# EAGLE board msp432 feather board (EAGLE 9.5.2)
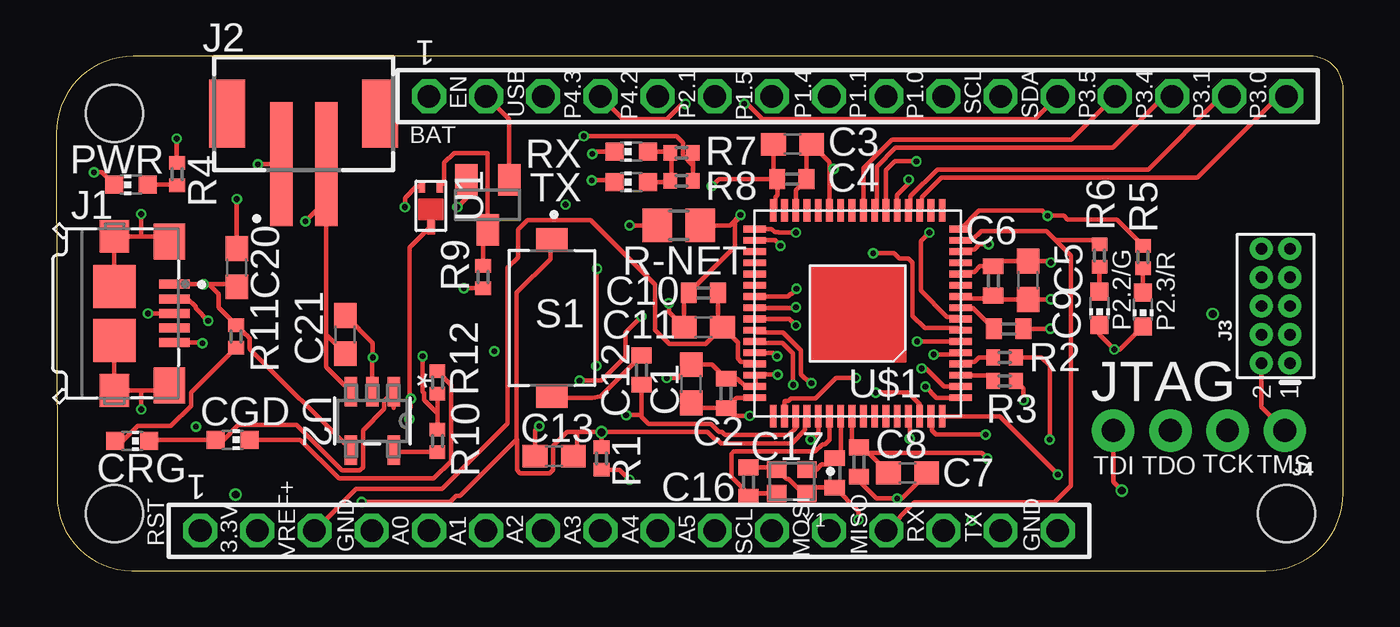
[diagram p0: board, top side]
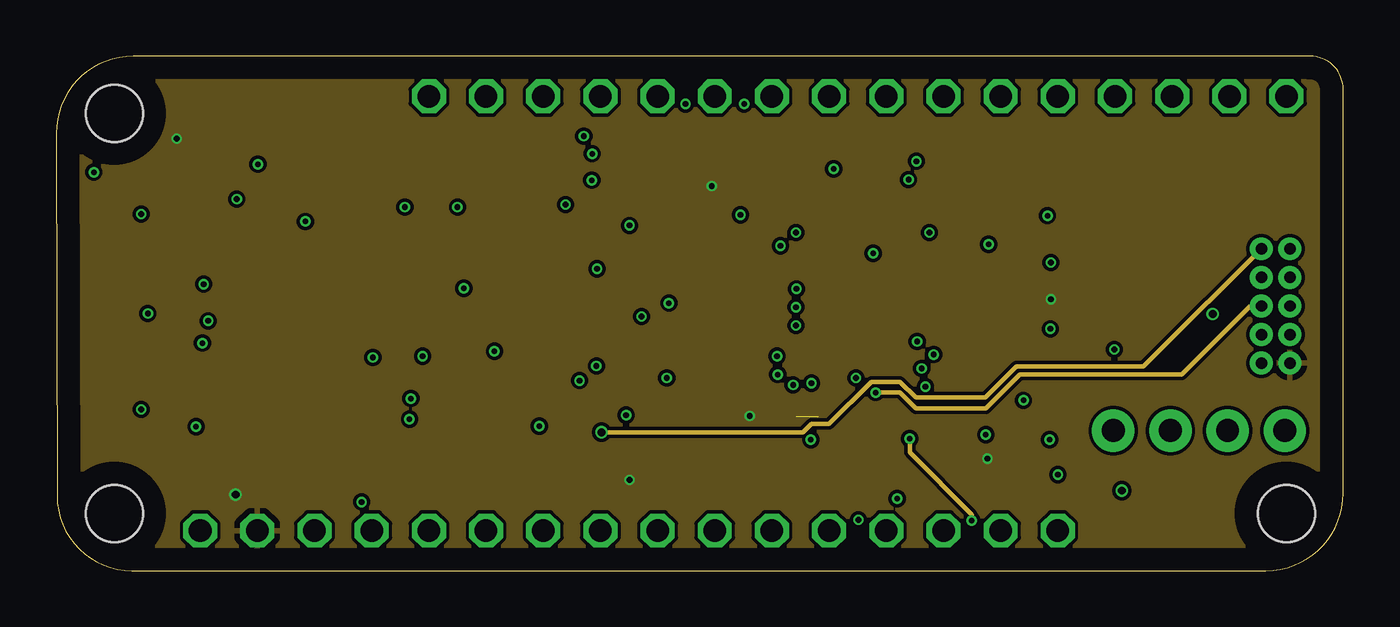
[diagram p1: board, inner layer Route2]
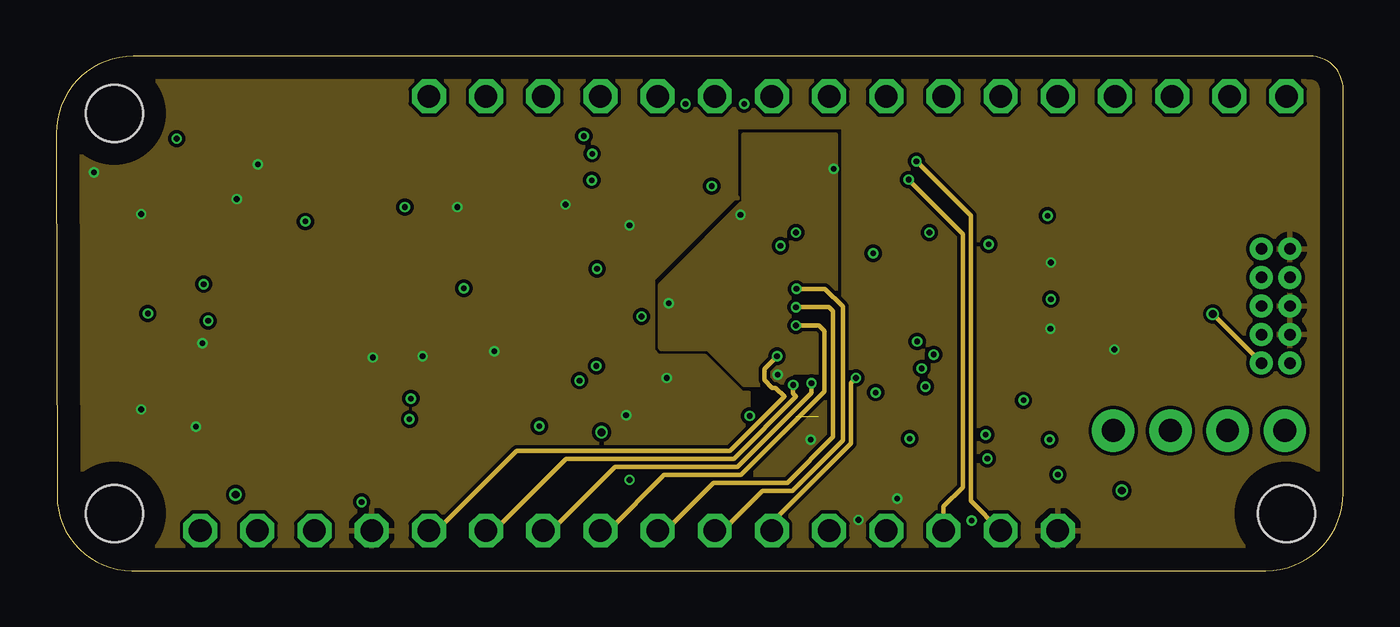
[diagram p2: board, inner layer Route15]
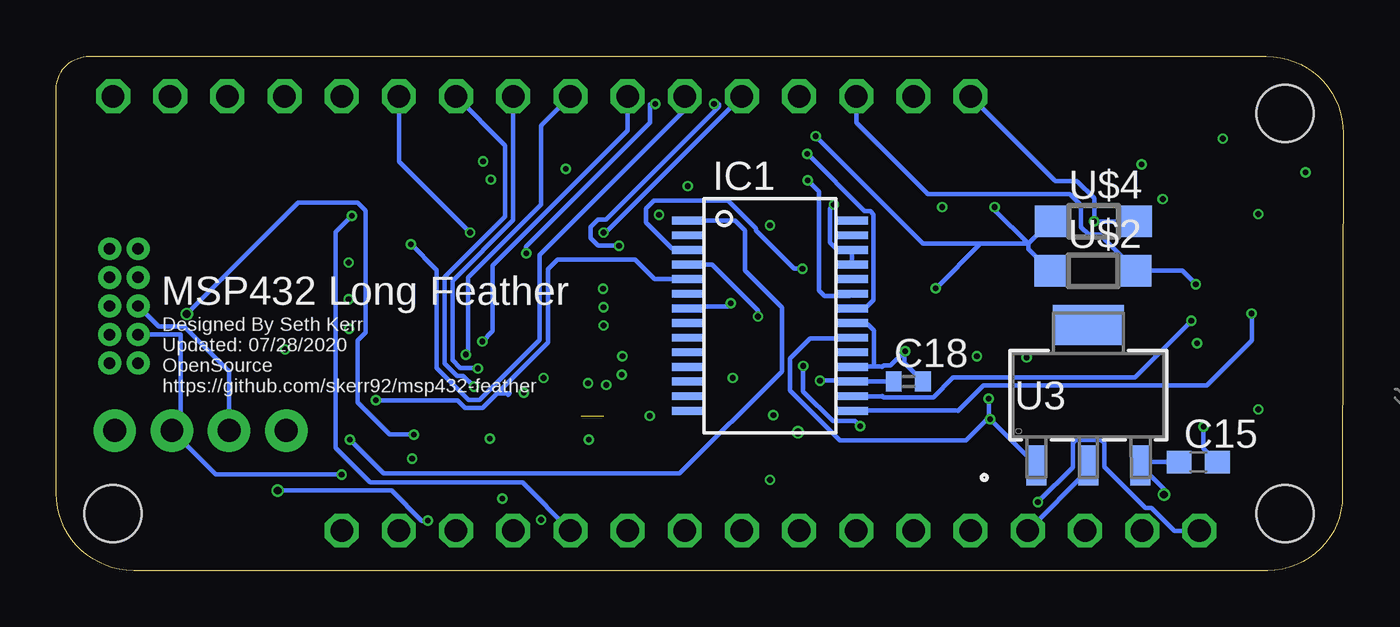
[diagram p3: board, bottom side, seen from below]

Size 57.17 x 22.86 mm. Coordinates in mm from the lower left corner, seen from the top.
Outline: 0,19.44 0.04,3.32 arc90 3.36,0 53.74,0 arc90 57.17,3.43 57.17,21.39 arc90 55.71,22.86 3.42,22.86 arc90 0,19.44
Copper layers (1+2*15+16): Top 0.035mm / dielectric 1.5mm / Route2 0.035mm / dielectric 0.15mm / Route15 0.035mm / dielectric 0.2mm / Bottom 0.035mm
Design rules "default *": minimum track width 6mil, minimum drill 10mil, track to track 6mil, track to pad 6mil, pad to pad 6mil, via to via 6mil, smd to smd 6mil, copper to edge 40mil, drill to drill 6mil, minimum pad ring 10mil, minimum via ring 4mil, stop-mask expansion 4mil, vias tented up to drill 35mil, thermal gap 10mil
Net classes: 0 default: width 0.203 mm, clearance 0.127 mm; 1 PWR: width 0.203 mm, clearance 0.127 mm; 2 analog: width 0.152 mm, clearance 0.152 mm; 3 digital: width 0.203 mm, clearance 0.152 mm
Holes 2.54 mm at 2.58,20.32 2.58,2.54 54.65,2.54

## Footprints (pad centres in the part's own frame; a part is rotated, then mirrored left to right if it is on the bottom)
C0603 = smd 1.1 x 1: 1 -0.85,0; 2 0.85,0
C0402 = smd 0.7 x 0.9: 1 -0.65,0; 2 0.65,0
CHIP-LED0603 = smd 0.8 x 0.8: A 0,-0.75; C 0,0.75
SSOP28-LD = smd 0.348 x 1.397: 1 -4.225,-3.656; 2 -3.575,-3.656; 3 -2.925,-3.656; 4 -2.275,-3.656; 5 -1.625,-3.656; 6 -0.975,-3.656; 7 -0.325,-3.656; 8 0.325,-3.656; 9 0.975,-3.656; 10 1.625,-3.656; 11 2.275,-3.656; 12 2.925,-3.656; 13 3.575,-3.656; 14 4.225,-3.656; 15 4.225,3.656; 16 3.575,3.656; 17 2.925,3.656; 18 2.275,3.656; 19 1.625,3.656; 20 0.975,3.656; 21 0.325,3.656; 22 -0.325,3.656; 23 -0.975,3.656; 24 -1.625,3.656; 25 -2.275,3.656; 26 -2.925,3.656; 27 -3.575,3.656; 28 -4.225,3.656
TE_1981568-1 = smd 0.4 x 1.35: 1 -1.3,2.675; 2 -0.65,2.675; 3 0,2.675; 4 0.65,2.675; 5 1.3,2.675 | smd 1.6 x 1.4: 6 -3.2,2.45; 7 3.2,2.45 | smd 1.45 x 1.3: 8 3.425,0; 9 -3.425,0 | smd 1.9 x 1.9: 10 -1.2,0; 11 1.2,0
JST_B2B-PH-SM4-TB(LF)(SN) = smd 1 x 5.5: 1 -1,0; 2 1,0 | smd 1.6 x 3: 3 -3.4,2.25; 4 3.4,2.25
2X5-PTH-1.27MM = drill 0.508 pad 1: 1 -2.54,-0.635; 2 -2.54,0.635; 3 -1.27,-0.635; 4 -1.27,0.635; 5 0,-0.635; 6 0,0.635; 7 1.27,-0.635; 8 1.27,0.635; 9 2.54,-0.635; 10 2.54,0.635
1X04_NO_SILK = drill 1.016 pad 1.88: 1 0,0; 2 2.54,0; 3 5.08,0; 4 7.62,0
R0402 = smd 0.6 x 0.7: 1 -0.5,0; 2 0.5,0
R0805 = smd 1.3 x 1.5: 1 -0.95,0; 2 0.95,0
SW_KSR223GLFG = smd 1 x 1.4: 1 -3.5,0; 2 3.5,0
X2-DFN2015-3 = smd 0.5 x 0.31: 1 1.3,0.65; 2 -0.45,1.05; 3 -0.45,0.25
SOT-23-5_MC = smd 1.321 x 0.559: 1 -1.295,0.95; 2 -1.295,0; 3 -1.295,-0.95; 4 1.295,-0.95; 5 1.295,0.95
DCY4 = smd 0.889 x 1.765: 1 -2.311,-3.118; 2 0,-3.118; 3 2.311,-3.118 | smd 3.15 x 1.765: 4 0,3.118
MSP432_QFN_64 = smd 1 x 0.3: 1 -4.575,3.75; 2 -4.575,3.25; 3 -4.575,2.75; 4 -4.575,2.25; 5 -4.575,1.75; 6 -4.575,1.25; 7 -4.575,0.75; 8 -4.575,0.25; 9 -4.575,-0.25; 10 -4.575,-0.75; 11 -4.575,-1.25; 12 -4.575,-1.75; 13 -4.575,-2.25; 14 -4.575,-2.75; 15 -4.575,-3.25; 16 -4.575,-3.75; 33 4.575,-3.75; 34 4.575,-3.25; 35 4.575,-2.75; 36 4.575,-2.25; 37 4.575,-1.75; 38 4.575,-1.25; 39 4.575,-0.75; 40 4.575,-0.25; 41 4.575,0.25; 42 4.575,0.75; 43 4.575,1.25; 44 4.575,1.75; 45 4.575,2.25; 46 4.575,2.75; 47 4.575,3.25; 48 4.575,3.75 | smd 0.3 x 1: 17 -3.75,-4.575; 18 -3.25,-4.575; 19 -2.75,-4.575; 20 -2.25,-4.575; 21 -1.75,-4.575; 22 -1.25,-4.575; 23 -0.75,-4.575; 24 -0.25,-4.575; 25 0.25,-4.575; 26 0.75,-4.575; 27 1.25,-4.575; 28 1.75,-4.575; 29 2.25,-4.575; 30 2.75,-4.575; 31 3.25,-4.575; 32 3.75,-4.575; 49 3.75,4.575; 50 3.25,4.575; 51 2.75,4.575; 52 2.25,4.575; 53 1.75,4.575; 54 1.25,4.575; 55 0.75,4.575; 56 0.25,4.575; 57 -0.25,4.575; 58 -0.75,4.575; 59 -1.25,4.575; 60 -1.75,4.575; 61 -2.25,4.575; 62 -2.75,4.575; 63 -3.25,4.575; 64 -3.75,4.575
SOD3716X117(SOD-123) = smd 1.4 x 1.4: 1 -1.9,0.051; 2 1.9,0.051
BSS138 = smd 1 x 1.4: D 0,1.1; G -0.95,-1.1; S 0.95,-1.1
TSW-116-XX-G-S = drill 1 pad 1.5 octagon: 1 19.05,0; 2 16.51,0; 3 13.97,0; 4 11.43,0; 5 8.89,0; 6 6.35,0; 7 3.81,0; 8 1.27,0; 9 -1.27,0; 10 -3.81,0; 11 -6.35,0; 12 -8.89,0; 13 -11.43,0; 14 -13.97,0; 15 -16.51,0; 16 -19.05,0
XTAL_ECS-480-10-37-JTN-TR = smd 0.85 x 0.75: 1 -0.675,-0.525; 2 0.675,-0.525; 3 0.675,0.525; 4 -0.675,0.525

## Placement (x,y rotation side)
C1  4.7uF  [C0603]  28.21,8.31 90 top
C2  0.1uF  [C0402]  29.76,7.87 90 top
C3  4.7uF  [C0603]  32.71,18.95 0 top
C4  0.1uF  [C0402]  32.68,17.4 0 top
C5  4.7uF  [C0603]  43.17,12.9 90 top
C6  0.1uF  [C0402]  41.62,12.88 90 top
C7  4.7uF  [C0603]  37.81,4.34 0 top
C8  0.1uF  [C0402]  35.65,4.83 270 top
C9  0.1uF  [C0402]  42.31,10.74 0 top
C10  47nF  [C0402]  28.75,12.34 180 top
C11  4.7uF  [C0603]  28.75,10.82 180 top
C12  1.1nF  [C0402]  26,8.92 270 top
C13  0.1uF  [C0603]  22.12,5.08 0 top
C15  3.3uF  [C0603]  6.44,4.83 0 bottom
C16  22pF  [C0402]  30.75,3.94 90 top
C17  22pF  [C0402]  34.59,4.34 270 top
C18  0.1uF  [C0402]  19.32,8.41 0 bottom
C20  10uF  [C0603]  8.02,13.46 90 top
C21  10uF  [C0603]  12.84,10.49 90 top
CGD  [CHIP-LED0603]  7.84,5.82 270 top
CRG  [CHIP-LED0603]  3.37,5.77 270 top
IC1  FT232RL  [SSOP28-LD]  25.47,11.33 270 bottom
J1  1981568-1  [TE_1981568-1]  2.58,11.43 270 top
J2  B2B-PH-SM4-TB(LF)(SN)  [JST_B2B-PH-SM4-TB(LF)(SN)]  10.99,18.06 0 top
J3  CORTEX_JTAG_DEBUG_MINIMUM_PTH  [2X5-PTH-1.27MM]  54.17,11.76 90 top
J4  [1X04_NO_SILK]  54.58,6.22 180 top
P2.2/G  [CHIP-LED0603]  46.35,11.66 180 top
P2.3/R  [CHIP-LED0603]  48.28,11.61 180 top
PWR  [CHIP-LED0603]  3.32,17.14 90 top
R1  47K  [R0402]  24.22,4.98 270 top
R2  1K  [R0402]  42.13,9.47 0 top
R3  1K  [R0402]  42.13,8.43 0 top
R4  330  [R0402]  5.38,17.63 270 top
R5  220  [R0402]  48.28,13.94 90 top
R6  220  [R0402]  46.35,14 90 top
R7  330  [R0402]  27.78,18.57 0 top
R8  330  [R0402]  27.78,17.32 0 top
R9  100K  [R0402]  18.97,13.06 90 top
R10  2K2  [R0402]  16.93,5.77 90 top
R11  470  [R0402]  7.99,10.41 90 top
R12  470  [R0402]  16.93,8.36 90 top
R-NET  0  [R0805]  27.65,15.34 0 top
RX  [CHIP-LED0603]  25.54,18.62 90 top
S1  KSR223GLFG  [SW_KSR223GLFG]  22.01,11.23 270 top
TX  [CHIP-LED0603]  25.54,17.27 90 top
U1  DMG3415U-7X2-DFN2015-3  [X2-DFN2015-3]  15.99,16.61 270 top
U2  MCP73831T-2ACI/OT  [SOT-23-5_MC]  14.04,6.65 270 top
U3  [DCY4]  11.32,7.8 0 bottom
U$1  MSP432P401MIRGCR  [MSP432_QFN_64]  35.6,11.43 180 top
U$2  MBR0520LT1G  [SOD3716X117(SOD-123)]  11.12,13.28 0 bottom
U$3  BSS138  [BSS138]  19.17,16.26 180 top
U$4  MBR0520LT1G  [SOD3716X117(SOD-123)]  11.09,15.47 0 bottom
X1  TSW-116-07-G-S  [TSW-116-XX-G-S]  25.44,1.78 180 top
X2  TSW-116-07-G-S  [TSW-116-XX-G-S]  35.6,21.08 180 top
Y1  ECS-480-10-37-JTN-TR  [XTAL_ECS-480-10-37-JTN-TR]  32.68,3.96 180 top

## Library data of the parts
C1-C13 C15-C18 C20 C21 = rcl; SPICEPREFIX: C
CGD CRG P2.2/G P2.3/R PWR RX TX = led
IC1 = FT232RL; AVAILABILITY: Unavailable; DESCRIPTION: USB Bridge, USB to UART USB 2.0 UART Interface 28-SSOP; MF: FTDI, Future; MP: FT232RL; PACKAGE: SSOP-28 FTDI, Future; PRICE: None
J1 = 1981568-1; AVAILABILITY: Unavailable; DESCRIPTION: USB - micro B USB 2.0 Receptacle Connector 5 Position Surface Mount, Right Angle; MF: TE Connectivity; MP: 19815681; PACKAGE: None; PRICE: None; TE_PURCHASE_URL: https://www.te.com/usa-en/product-19815681.html?te_bu=Cor&te_type=disp&te_campaign=seda_glo_cor-seda-global-disp-prtnr-fy19-seda-model-bom-cta_sma-317_1&elqCampaignId=32493
J2 = B2B-PH-SM4-TB_LF__SN_; AVAILABILITY: Unavailable; DESCRIPTION: Connector Header Surface Mount 2 position 0.079 _2.00mm_; MF: JST Sales; MP: B2B-PH-SM4-TB_LF__SN_; PACKAGE: None; PRICE: None
J3 = SparkFun-Connectors
J4 = SparkFun-Connectors; PROD_ID: CONN-09696
R1-R12 R-NET = rcl; SPICEPREFIX: R
S1 = KSR223GLFG; AVAILABILITY: Unavailable; DESCRIPTION: Tactile Switch SPST-NO Top Actuated Surface Mount; MF: C&K; MP: KSR223GLFG; PACKAGE: None; PRICE: None
U1 = DMG3415U-7
U2 = MCP73831-2ACI; BUILT_BY: EMA_UL_Team; MANUFACTURER_PART_NUMBER: MCP73831T-2ACI/OT; VENDOR: Microchip
U3 = UA78M05CDCYR; BUILT_BY: EMA_UL_Team; MANUFACTURER_PART_NUMBER: UA78M05CDCYR; VENDOR: Texas Instruments
U$1 = MSP432P401MIRGCR; AVAILABILITY: Unavailable; DESCRIPTION: ARM® Cortex®-M4F MSP432™ Microcontroller IC 32-Bit 48MHz 128KB _128K x 8_ FLASH 64-VQFN _9x9_; MF: Texas Instruments; MP: MSP432P401MIRGCR; PACKAGE: VQFN-64 Texas Instruments; PRICE: None
U$2 U$4 = MBR0520LT1G; AVAILABILITY: Unavailable; DESCRIPTION: Diode Schottky 20V 500mA Surface Mount SOD-123; MF: ON Semiconductor; MP: MBR0520LT1G; PACKAGE: SOD-123 ON Semiconductor; PRICE: None
U$3 = BSS138; AVAILABILITY: Unavailable; DESCRIPTION: N-Channel 50V 220mA _Ta_ 360mW _Ta_ Surface Mount Die; MF: MICROSS/On Semiconductor; MP: BSS138; PACKAGE: TO-236-3 Micross; PRICE: None
X1 X2 = con-samtec; MF: Samtec Inc.; MPN: TSW-116-07-G-S
Y1 = ECS-480-10-37-JTN-TR; AVAILABILITY: Unavailable; DESCRIPTION: 48MHz ±20ppm Crystal 10pF 50 Ohms 4-SMD, No Lead; MF: ECS Inc.; MP: ECS-480-10-37-JTN-TR; PACKAGE: SMD-4 ECS International; PRICE: None

## Nets
3V3 [PWR]: C18.1 IC1.4 IC1.17
5V+ [PWR]: R7.2 R8.2 R9.1 U1.3 U$2.1 U$4.1
+3.3V [PWR]: C1.1 C2.1 C3.1 C4.1 C5.1 C6.1 C7.1 C8.1 C15.1 J3.1 R1.2 R4.1 U3.3 U$1.10 U$1.32 U$1.48 U$1.56 X1.2
+5V [PWR]: R7.1 R8.1 RX.A TX.A
A0 [analog]: U$1.44 X1.5
A1 [analog]: U$1.43 X1.6
A2 [analog]: U$1.42 X1.7
A3 [analog]: U$1.41 X1.8
A4 [analog]: U$1.40 X1.9
A5 [analog]: U$1.39 X1.10
DM: IC1.16 J1.2
DP: IC1.15 J1.3
EN: U$3.G X2.2
GND [PWR]: C1.2 C2.2 C3.2 C4.2 C5.2 C6.2 C7.2 C8.2 C9.2 C10.2 C11.2 C12.2 C15.2 C16.2 C17.2 C18.2 C20.2 C21.2 IC1.7 IC1.18 IC1.21 IC1.25 IC1.26 J1.5 J1.6 J1.7 J1.8 J1.9 J1.10 J1.11 J2.1 J3.3 J3.5 J3.9 P2.2/G.C P2.3/R.C PWR.C R10.2 R12.1 R-NET.1 R-NET.2 U2.2 U3.2 U$1.12 U$1.27 U$1.30 U$1.46 U$1.47 U$1.51 U$1.53 U$3.S X1.4 X1.16 Y1.2 Y1.4
MISO [digital]: R6.2 U$1.15 X1.13
MOSI [digital]: R5.2 U$1.16 X1.12
N$1: C9.1 U$1.9
N$2: R10.1 U2.5
N$3: C13.1 IC1.3
N$7: IC1.5 R3.2
N$8: IC1.1 R2.2
N$10: C12.1 S1.2
N$11: IC1.22 RX.C
N$12: IC1.23 TX.C
N$13: P2.2/G.A R6.1
N$14: R2.1 U$1.4
N$15: R3.1 U$1.3
N$17: R9.2 U1.2 U$3.D
N$18: CGD.A CRG.C U2.1
N$24: CGD.C R12.2
N$25: CRG.A R11.1
N$41: PWR.A R4.2
N$42: P2.3/R.A R5.1
N$47: C16.1 U$1.54 Y1.3
N$48: C17.1 U$1.55 Y1.1
P1.0 [digital]: U$1.1 X2.10
P1.1 [digital]: U$1.2 X2.9
P1.4 [digital]: U$1.5 X2.8
P1.5 [digital]: U$1.6 X2.7
P2.0: U$1.13
P2.1 [digital]: U$1.14 X2.6
P3.0: U$1.19 X2.16
P3.1: U$1.20 X2.15
P3.4 [digital]: U$1.23 X2.14
P3.5 [digital]: U$1.24 X2.13
P4.2: U$1.33 X2.5
P4.3: U$1.34 X2.4
RST: C13.2 J3.10 R1.1 S1.1 U$1.52 X1.1
RX [digital]: U$1.21 X1.14
SCL [analog]: U$1.8 X2.11
SCL1 [analog]: U$1.50 X1.11
SDA [analog]: U$1.7 X2.12
TCK: J3.4 J4.2 U$1.64
TDI: J4.4 U$1.61
TDO: J3.6 J4.3 U$1.62
TMS: J3.2 J4.1 U$1.63
TX [digital]: U$1.22 X1.15
VBAT [PWR]: C21.1 J2.2 U2.3 U$4.2 X2.1
VIN [PWR]: IC1.20 U1.1 U3.1
VREF+ [analog]: C10.1 C11.1 U$1.45 X1.3
VUSB [PWR]: C20.1 J1.1 R11.2 U2.4 U$2.2 X2.3

## Tracks (layer width: path | path; a pad name or v marks a point on that pad's centre or on a via)
3V3  (via drill 0.25)
  Top 0.203: v23.25,8.45 24.22,8.45 25.29,9.51 25.29,10.58 v26,11.29
  Bottom 0.203: C18.1 21.74,8.41 | 21.74,8.41 IC1.17 | 21.74,8.41 21.74,8.45 IC1.17 21.91,8.45 v23.25,8.45 | v26,11.29 26,11.56 28.05,13.6 IC1.4
5V+  (via drill 0.25)
  Top 0.203: v18.1,12.55 v18.11,12.56 R9.1 | v15.49,16.15 15.49,16.56 15.99,17.06 U1.3 | R7.2 28.28,18.01 | 28.28,18.01 R8.2 | 28.28,18.01 27.83,18.45 27.83,19.02 27.55,19.31 v23.44,19.31
  Bottom 0.203: U$4.1 13.98,14.53 | 13.98,14.53 13.98,14.3 U$2.1 | 13.98,14.53 16.12,14.53 | 16.12,14.53 v18.1,12.55 | 13.98,14.53 15.49,16.03 v15.49,16.15 | 16.12,14.53 18.66,14.53 v23.44,19.31
+3.3V  (via drill 0.25, 0.35)
  Top 0.203: U$1.56 35.35,5.78 C8.1 35.83,5.48 | 35.83,5.48 C7.1 | U$1.10 40.27,12.08 41.48,12.08 C6.1 41.8,12.05 C5.1 44.18,12.05 v44.19,12.06 | 32.03,16.99 C4.1 29.43,17.4 v29.12,17.09 | 32.03,16.99 32.03,16.69 31.95,16.61 31.95,16.1 U$1.32 | C3.1 31.86,17.17 32.03,16.99 | 35.83,5.48 35.85,5.48 35.6,5.22 41.12,5.22 v41.37,4.97 | R4.1 5.35,18.15 v5.35,19.2 | C1.1 28.44,7.22 C2.1 | C2.1 30.22,7.68 U$1.48 | v30.8,6.88 30.11,6.88 C2.1 | R1.2 25.02,4.48 v25.47,4.03
  Bottom 0.203: C15.1 8.86,4.83 U3.3 7.97,3.64 v7.97,3.38
  pour Route2: 0.04,22.89 57.14,22.89 57.22,22.81 57.22,0.15 57.07,0 0.25,0 0.12,0.13 0.12,22.81
+5V
  Top 0.203: RX.A 27.23,18.62 R7.1 27.34,18.49 27.34,17.34 R8.1 27.23,17.27 TX.A
A0  (via drill 0.25)
  Top 0.203: U$1.44 31.87,9.68 v32.02,9.53
  Route15 0.203: v32.02,9.53 32.02,9.51 31.46,8.95 31.46,8.47 31.81,8.13 31.95,8.13 32.34,7.73 29.93,5.33 20.45,5.33 16.91,1.78 X1.5
A1  (via drill 0.25)
  Top 0.203: v32.73,8.26 32.73,9.64 32.26,10.11 31.1,10.11 U$1.43
  Route15 0.203: v32.73,8.26 32.73,7.87 32.87,7.74 30.11,4.97 22.64,4.97 19.45,1.78 X1.6
A2  (via drill 0.25)
  Top 0.203: U$1.42 31.12,10.58 32.29,10.58 33.09,9.79 33.09,8.73 33.48,8.33 v33.55,8.33
  Route15 0.203: v33.55,8.33 33.55,7.91 30.25,4.62 24.82,4.62 21.99,1.78 X1.7
A3  (via drill 0.25)
  Top 0.203: U$1.41 32.56,11.18 32.62,11.12 32.63,11.12 v32.86,10.9
  Route15 0.203: v32.86,10.9 33.88,10.9 34.13,10.64 34.13,7.96 30.43,4.26 27.01,4.26 24.53,1.78 X1.8
A4  (via drill 0.25)
  Top 0.203: U$1.40 32.83,11.68 v32.86,11.71
  Route15 0.203: v32.86,11.71 34.33,11.71 34.51,11.53 34.51,5.94 32.48,3.9 29.19,3.9 27.07,1.78 X1.9
A5  (via drill 0.25)
  Top 0.203: U$1.39 32.5,12.18 32.62,12.29 32.66,12.29 v32.89,12.52
  Route15 0.203: v32.89,12.52 34.16,12.52 34.94,11.73 34.94,5.79 32.7,3.55 31.38,3.55 29.61,1.78 X1.10
DM  (via drill 0.25)
  Top 0.203: J1.2 5.84,12.08 6.19,11.73 6.19,11.66 v6.75,11.1
  Bottom 0.203: v6.75,11.1 9.26,8.59 17.34,8.59 18.22,7.7 20.43,7.7 | 20.43,7.7 20.48,7.75 | IC1.16 21.74,7.73 20.49,7.73 20.43,7.7
DP  (via drill 0.25)
  Top 0.203: 4.11,11.47 v4.07,11.43 J1.3
  Bottom 0.203: v4.07,11.43 4.07,10.23 6.06,8.23 15.99,8.23 17.12,7.1 17.2,7.11 21.74,7.11 IC1.15
EN
  Top 0.203: X2.2 20.12,20.06 U$3.G
GND  (via drill 0.25)  (1 unrouted)
  Top 0.203: C8.2 35.78,4.05 35.59,4.05 36.44,3.2 v37.36,3.2 37.57,3.2 38.66,4.29 C7.2 | U$1.12 40.27,13.28 40.78,13.28 41.04,13.53 C6.2 41.85,13.75 C5.2 44.13,13.75 v44.19,13.69 | U$1.30 32.85,16.92 C4.2 33.33,18.72 C3.2 34.35,18.15 34.35,17.85 | U$1.51 32.85,6.35 32.53,6.03 29.71,6.03 29.57,6.16 29.46,6.16 29.42,6.18 29.08,6.53 26.31,6.53 26,6.83 | C12.2 26,6.83 | 34.35,17.85 U$1.27 | R12.1 16.93,6.99 | 16.93,6.99 R10.2 | v32.05,8.71 31.06,8.71 U$1.46 31.07,8.62 31.07,8.27 U$1.47 30.61,8.18 30.27,8.52 C2.2 29.13,9.16 C1.2 27.62,8.56 v27.12,8.56 | v27.21,11.89 27.21,11.5 C11.2 27.9,12.14 C10.2 30.15,14.4 30.15,15.49 30.44,15.78 30.43,15.78 v30.39,15.81 29.92,15.34 R-NET.2 | 26,6.83 25.93,6.91 v25.32,6.91 | P2.2/G.C 46.35,10.49 v47.01,9.83 47.25,9.83 P2.3/R.C | U2.2 14.04,9.45 v14.06,9.47 14.06,10.12 C21.2 | J2.1 v8.96,18.06 | C20.2 v8.02,16.51 | PWR.C 2.01,17.7 v1.67,17.7 | J1.6 4.81,14.86 3.78,14.86 | 3.78,14.86 2.63,14.86 | 2.63,14.86 J1.9 | 3.78,14.86 v3.78,15.85 | J1.10 2.58,14.8 2.63,14.86 | J1.11 J1.8 3.85,8.01 | J1.7 4.81,8.01 3.85,8.01 | 3.85,8.01 3.78,7.93 v3.78,7.16 | J1.5 6.47,10.13 v6.5,10.11 | C9.2 v44.16,10.74 | R-NET.1 v25.47,15.34 | 16.93,6.99 16.34,7.58 16.34,7.89 16.27,7.95 v16.27,9.53 | U$3.S 18.22,16.55 v17.82,16.15 | v34.54,17.86 34.53,17.85 34.35,17.85 | v35.64,2.25 35.64,2.64 C17.2 33.61,3.69 Y1.4 33.17,3.44 32.54,4.07 32.43,4.07 Y1.2 31.91,4.59 C16.2 | v33.52,5.82 33.85,6.15 U$1.53
  Bottom 0.203: X1.4 11.32,4.47 U3.2 | 19.5,9.72 20.11,9.11 20.43,9.11 20.49,9.05 20.58,9.07 20.85,9.07 | 19.5,9.72 v19.47,9.75 | C18.2 19.5,9.23 19.5,9.72 | C15.2 6.21,5.44 v6.21,6.4 | IC1.7 29.11,11.73 27.34,11.73 27.25,11.82 v27.21,11.89 | IC1.25 21.82,13.69 21.82,14.22 IC1.26 21.91,14.22 22.45,14.22 22.8,14.58 22.8,16.09 v22.62,16.27 | 20.85,9.07 21.74,9.07 IC1.18 | 20.85,9.07 20.85,10.67 21.11,10.94 21.74,10.94 IC1.21
  pour Route15: 33.95,8.81 32.73,8.81 32.17,8.26 30.55,8.26 28.95,9.86 26.87,9.86 26.81,9.91 26.81,12.7 27.32,13.21 30.42,16.31 30.52,16.31 30.52,19.38 34.64,19.38 34.64,9.55 34.64,9.5
  pour Route15: 31.06,8.08 31.06,0.03 31.03,0 57.19,0 57.22,0.03 57.22,22.83 0.07,22.83 0.07,0 30.73,0 30.75,-0.03 30.75,7.87 30.78,7.9 30.47,7.9 28.82,9.55 26.74,9.55 26.51,9.78 26.51,12.95 30.12,16.56 30.29,16.56 30.19,16.66 30.19,19.71 34.97,19.71 34.97,8.03 35.02,7.98 31.16,7.98
MISO
  Top 0.203: U$1.15 40.69,14.68 41.09,15.09 43.99,15.09 44.39,14.68 | 44.39,14.68 46.16,14.68 R6.2 | X1.13 38.12,3.02 44.34,3.02 45.08,3.76 45.08,13.99 44.39,14.68
MOSI  (via drill 0.25)
  Top 0.203: U$1.16 40.99,15.99 43.82,15.99 v44.04,15.77 44.76,15.77 44.93,15.61 47.11,15.61 R5.2
  Bottom 0.203: X1.12 36.47,3.91 43.22,3.91 44.77,5.46 44.77,15.04 v44.04,15.77
N$1
  Top 0.203: U$1.9 40.72,11.68 C9.1
N$2
  Top 0.203: R10.1 15.08,5.27 U2.5
N$3  (via drill 0.25)
  Top 0.203: C13.1 21.27,6.23 v21.46,6.42 | v24,9.09 24,13.39 v24.02,13.41
  Bottom 0.203: v21.46,6.42 21.68,6.65 22.67,6.65 24,7.97 v24,9.09 | IC1.3 29.2,14.31 29.83,14.31 30.98,15.47 30.98,16.09 30.63,16.45 27.34,16.45 26.09,15.2 26.09,15.11 24.4,13.42 24.05,13.42 v24.02,13.41
N$7  (via drill 0.25)
  Top 0.203: v42.97,7.57 42.97,8.1 R3.2
  Bottom 0.203: 37.59,7.87 35.33,10.13 35.33,13.4 34.91,13.82 31.46,13.82 30.83,13.19 30.83,13.18 30.6,12.95 IC1.5 | 37.1,7.8 37.03,7.87 37.59,7.87 | 37.59,7.87 38.23,7.24 39.01,7.24 39.34,7.57 v42.97,7.57
N$8  (via drill 0.25)
  Top 0.203: R2.2 43.77,9.47 44.13,9.12 v44.13,5.82
  Bottom 0.203: v44.13,5.82 42.62,4.31 29.48,4.31 24.94,8.86 24.94,11.68 26.59,13.34 26.59,15.11 27.03,15.55 IC1.1
N$10
  Top 0.203: C12.1 24.19,7.75 23.8,7.67 22.07,7.67 S1.2
N$11  (via drill 0.25)
  Top 0.203: RX.C 23.9,18.62 v23.81,18.53
  Bottom 0.203: IC1.22 21.24,11.65 20.86,12.02 20.86,15.83 21.01,15.98 21.26,15.98 v23.81,18.53
N$12  (via drill 0.25)
  Top 0.203: v23.79,17.35 24.72,17.35 TX.C
  Bottom 0.203: v23.79,17.35 23.28,16.84 23.28,12.45 23.04,12.21 21.91,12.21 IC1.23
N$13
  Top 0.203: R6.1 P2.2/G.A
N$14
  Top 0.203: U$1.4 40.27,9.28 40.78,9.28 40.98,9.47 R2.1
N$15
  Top 0.203: U$1.3 41.38,8.68 R3.1
N$17
  Top 0.203: R9.2 18.97,15.36 U$3.D 19.17,18.56 17.67,18.56 17.24,18.14 17.24,17.25 U1.2
N$18
  Top 0.203: CRG.C 4.17,5.82 CGD.A 7.43,5.82 8.09,6.47 10.68,6.47 12.7,4.45 13.47,4.45 13.62,4.59 13.62,6.24 14.57,7.18 14.57,7.53 U2.1 14.99,7.22
N$24
  Top 0.203: CGD.C 10.83,5.82 12.56,4.09 16.77,4.09 17.54,4.86 17.54,8.26 17.39,8.41 17.38,8.41 R12.2
N$25
  Top 0.203: R11.1 5.99,7.91 5.99,7.33 5.08,6.42 3.62,6.42 2.96,5.77 CRG.A
N$41
  Top 0.203: PWR.A 5.36,17.14 R4.2
N$42
  Top 0.203: R5.1 P2.3/R.A
N$47
  Top 0.203: U$1.54 34.35,5.81 34.16,5.62 34.03,5.62 33.71,5.29 30.1,5.29 30,5.2 30,4.16 30.75,3.4 C16.1 30.9,3.44 Y1.3
N$48
  Top 0.203: Y1.1 33.76,4.49 33.99,4.71 34.31,4.71 C17.1 34.85,5.26 U$1.55
P1.0  (via drill 0.25)
  Top 0.203: U$1.1 39.11,7.68 v38.62,8.18
  Bottom 0.203: v38.62,8.18 39.1,8.66 39.37,8.66 39.92,9.21 39.92,13.05 37.23,15.74 37.23,18.9 X2.10
P1.1  (via drill 0.25)
  Top 0.203: v38.45,8.99 38.63,8.99 39.44,8.18 U$1.2
  Bottom 0.203: v38.45,8.99 38.47,9.02 39.22,9.02 39.57,9.36 39.57,12.88 36.87,15.57 X2.9
P1.4  (via drill 0.25)
  Top 0.203: U$1.5 40.13,9.63 40.1,9.6 v38.98,9.6
  Bottom 0.203: v38.98,9.6 38.88,9.7 38.88,13.03 35.63,16.28 35.63,19.79 X2.8
P1.5  (via drill 0.25)
  Top 0.203: v38.25,10.19 U$1.6
  Bottom 0.203: X2.7 31.79,19.56 37.79,13.56 37.79,10.64 v38.25,10.19
P2.1  (via drill 0.25)
  Top 0.203: U$1.14 40.27,14.28 40.79,14.28 41.01,14.5 v41.42,14.5
  Bottom 0.203: v41.42,14.5 40.28,13.36 40.28,9.01 38.86,7.59 38.37,7.59 35.71,10.25 35.71,14.02 29.25,20.47 X2.6
P3.0
  Top 0.203: U$1.19 38.45,16.1 38.45,16.61 39.31,17.48 50.69,17.48 54.3,21.08 X2.16
P3.1
  Top 0.203: U$1.20 37.95,16.1 37.95,16.64 39.14,17.83 48.51,17.83 51.76,21.08 X2.15
P3.4
  Top 0.203: U$1.23 36.45,16.1 36.45,17.96 37.29,18.8 46.94,18.8 49.22,21.08 X2.14
P3.5
  Top 0.203: X2.13 45.1,19.15 37.13,19.15 35.85,17.88 U$1.24
P4.2  (via drill 0.25)
  Top 0.203: v32.86,15.02 32.09,15.02 32.08,15.04 31.92,15.04 31.78,15.18 U$1.33
  Bottom 0.203: X2.5 32.77,15.02 v32.86,15.02
P4.3  (via drill 0.25)
  Top 0.203: v32.17,14.44 31.93,14.68 U$1.34 | v27.95,20.74 27.79,20.74 27.13,20.07 25.18,20.07 X2.4
  Bottom 0.203: v32.17,14.44 33.1,14.44 33.44,14.78 33.44,15.26 33.1,15.61 32.74,15.61 27.72,20.63 27.72,20.74 v27.95,20.74
RST  (via drill 0.25, 0.35)
  Top 0.203: 20.46,5.84 20.46,12.36 21.95,13.85 21.95,14.66 S1.1 | 20.46,5.84 17.95,3.33 17.77,3.33 17.49,3.05 v13.57,3.05 | U$1.52 33.26,6.76 33.26,6.25 32.67,5.66 29.52,5.66 29.38,5.81 29.21,5.89 28.93,6.17 24.25,6.17 | 24.25,6.17 23.13,6.17 | 23.13,6.17 22.7,6.17 22.07,5.55 22.07,4.47 21.92,4.33 20.61,4.33 20.46,4.47 20.46,5.83 20.46,5.84 | R1.1 v24.22,6.15 24.25,6.17 | 23.36,5.48 C13.2 23.13,5.25 23.13,6.17
  Route2 0.203: J3.10 51.17,11.94 51.16,11.94 48.29,9.07 42.66,9.07 41.28,7.69 38.19,7.69 37.49,8.39 36.2,8.39 34.34,6.53 33.55,6.53 33.17,6.15 v24.22,6.15
  Bottom 0.203: v13.57,3.05 12.02,4.6 12.02,5.67 11.87,5.82 10.77,5.82 10.62,5.67 10.62,4.61 8.8,2.79 8.52,2.79 7.51,1.78 X1.1
RX  (via drill 0.25)
  Top 0.203: v37.86,17.38 37.86,17.19 37.35,16.68 U$1.21
  Route15 0.203: X1.14 39.41,2.85 40.28,3.71 40.28,14.96 v37.86,17.38
SCL  (via drill 0.25)
  Top 0.203: U$1.8 40.08,11.28 39.57,11.28 38.41,12.44 38.41,14.64 v38.79,15.02
  Bottom 0.203: v38.79,15.02 41.95,18.19 X2.11
SCL1  (via drill 0.25)
  Top 0.203: v35.53,8.56 34.64,8.56 33.74,7.66 32.65,7.66 32.53,7.54 32.38,7.54 32.35,7.52 U$1.50
  Route15 0.203: v35.53,8.56 35.3,8.33 35.3,5.64 31.79,2.14 X1.11
SDA  (via drill 0.25)
  Top 0.203: U$1.7 40.08,10.78 38.58,10.78 38.03,11.33 38.03,13.68 37.85,13.86 37.47,13.86 37.22,14.1 v36.3,14.1 | v30.56,20.74 30.71,20.74 31.38,20.07 43.49,20.07 X2.12
  Bottom 0.203: v36.3,14.1 36.3,14.39 30.79,19.9 30.79,20.74 v30.56,20.74
TCK  (via drill 0.25)
  Top 0.203: v44.49,4.27 41.92,6.84 39.43,6.84 U$1.64
  Bottom 0.203: J3.4 51.64,10.49 51.64,6.62 J4.2 50.08,4.27 v44.49,4.27
TDI  (via drill 0.25, 0.35)
  Top 0.203: v37.91,5.87 37.91,6.84 U$1.61 | v47.34,3.56 46.96,3.94 J4.4
  Route2 0.203: v37.91,5.87 37.91,5.25 40.67,2.49 v40.67,2.22
  Bottom 0.203: v40.67,2.22 40.94,2.22 42.27,3.56 v47.34,3.56
TDO  (via drill 0.25)
  Top 0.203: v36.4,7.91 37.83,7.91 38.36,7.38 38.36,6.93 U$1.62
  Route2 0.203: v36.4,7.91 37.47,7.91 38.18,7.2 41.29,7.2 42.8,8.71 50.01,8.71 53.05,11.76 J3.6
  Bottom 0.203: J3.6 52.62,10.85 51.5,10.85 49.5,8.85 J4.3
TMS  (via drill 0.25, 0.35)
  Top 0.203: v41.29,6.04 39.07,6.04 38.89,6.22 38.89,6.84 U$1.63 | J4.1 53.54,7.26 J3.2
  Route15 0.203: v51.38,11.4 53.54,9.25 J3.2
  Bottom 0.203: v41.29,6.04 42.36,6.04 43.78,7.47 43.78,10.22 43.43,10.58 43.43,16 43.78,16.36 46.42,16.36 v51.38,11.4
TX  (via drill 0.25)
  Top 0.203: U$1.22 36.85,17.8 37.25,18.19 v38.21,18.19
  Route15 0.203: v38.21,18.19 40.63,15.77 40.63,3.1 X1.15
VBAT  (via drill 0.25)
  Top 0.203: 11.99,10.49 J2.2 11.99,16.44 v11.07,15.52 | 11.99,10.49 C21.1 | U2.3 11.99,9.05 11.99,10.49
  Bottom 0.203: X2.1 12.78,17.31 11.83,17.31 11.07,16.55 v11.07,15.52 U$4.2
VIN  (via drill 0.25)
  Top 0.203: U1.1 15.69,14.36 15.69,7.19 | 15.69,7.19 v15.69,6.73 | 15.69,7.19 15.75,7.25 v15.75,7.64
  Bottom 0.203: v15.69,6.73 U3.1 | v15.75,7.64 15.75,6.79 v15.69,6.73 | IC1.20 21.82,10.31 23.69,10.31 24.58,9.42 24.58,8 22.36,5.78 16.76,5.78 15.78,6.76 v15.69,6.73
VREF+
  Top 0.203: C11.1 30.27,10.14 30.27,9.43 30.42,9.28 30.93,9.28 U$1.45 | C11.1 29.4,11.02 C10.1 | C11.1 28.84,10.07 27.24,10.07 26.6,10.7 26.6,12.71 23.73,15.58 20.93,15.58 20.52,15.16 20.52,13.92 20.51,13.92 20.05,13.46 20.05,6.54 17.14,3.63 13.33,3.63 X1.3
VUSB  (via drill 0.25)
  Top 0.203: J1.1 v6.55,12.73 6.77,12.73 | 6.77,12.73 7.9,12.73 C20.1 | 6.77,12.73 7.21,12.3 7.21,11.7 R11.2 8.44,10.47 8.45,10.47 8.6,10.32 8.6,9.85 U2.4
  Bottom 0.203: v6.55,12.73 7.15,13.34 U$2.2 10.82,14.94 11.31,14.94 11.65,15.28 11.65,16.26 12.13,16.74 18.46,16.74 21.63,19.91 X2.3

## Text on the board
tNames: EN | USB | P4.3 | P4.2 | P2.1 | P1.5 | P1.4 | P1.1 | P1.0 | SCL | SDA | P3.5 | P3.4 | P3.1 | P3.0 | BAT | JTAG | 2 / 1 | TDI | TDO | TCK | TMS | RST | 3.3V | VREF+ | GND | A0 | A1 | A2 | A3 | A4 | A5 | SCL | MOSI | MISO | RX | TX | GND
bNames: MSP432 Long Feather | Designed By Seth Kerr / Updated: 07/28/2020 / OpenSource / https://github.com/skerr92/msp432-feather